# Altium PCB pcb.pcbdoc
Units mm, origin at the board's own origin, x right, y up, seen from the top; angles counter-clockwise.
Board outline 60 x 71 mm, 2 copper layers (Top Layer, Bottom Layer), stack 1.56 mm thick; 54 components, 49 nets, 248 pads, 127 vias.
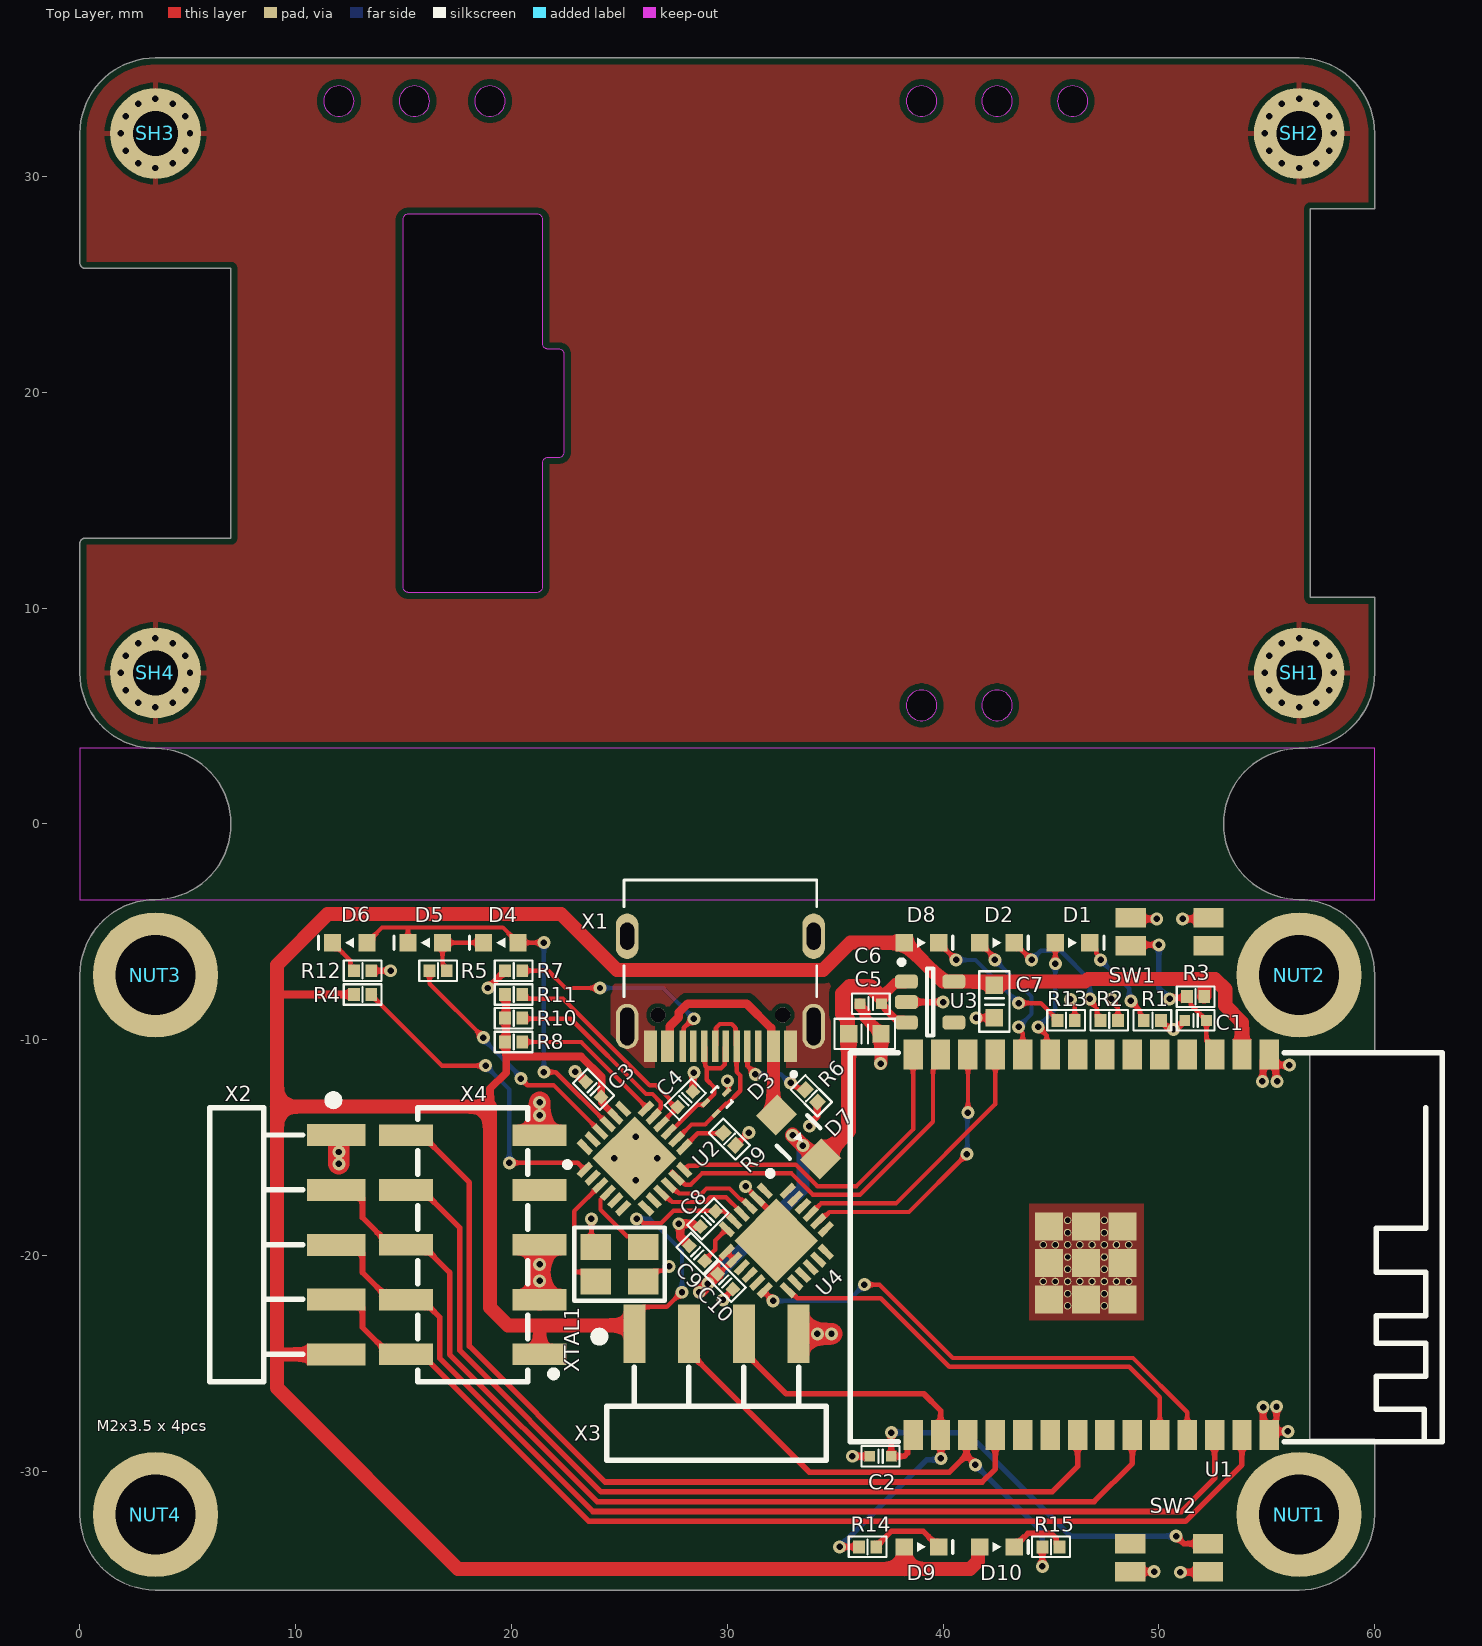
[diagram p0: Top Layer view]
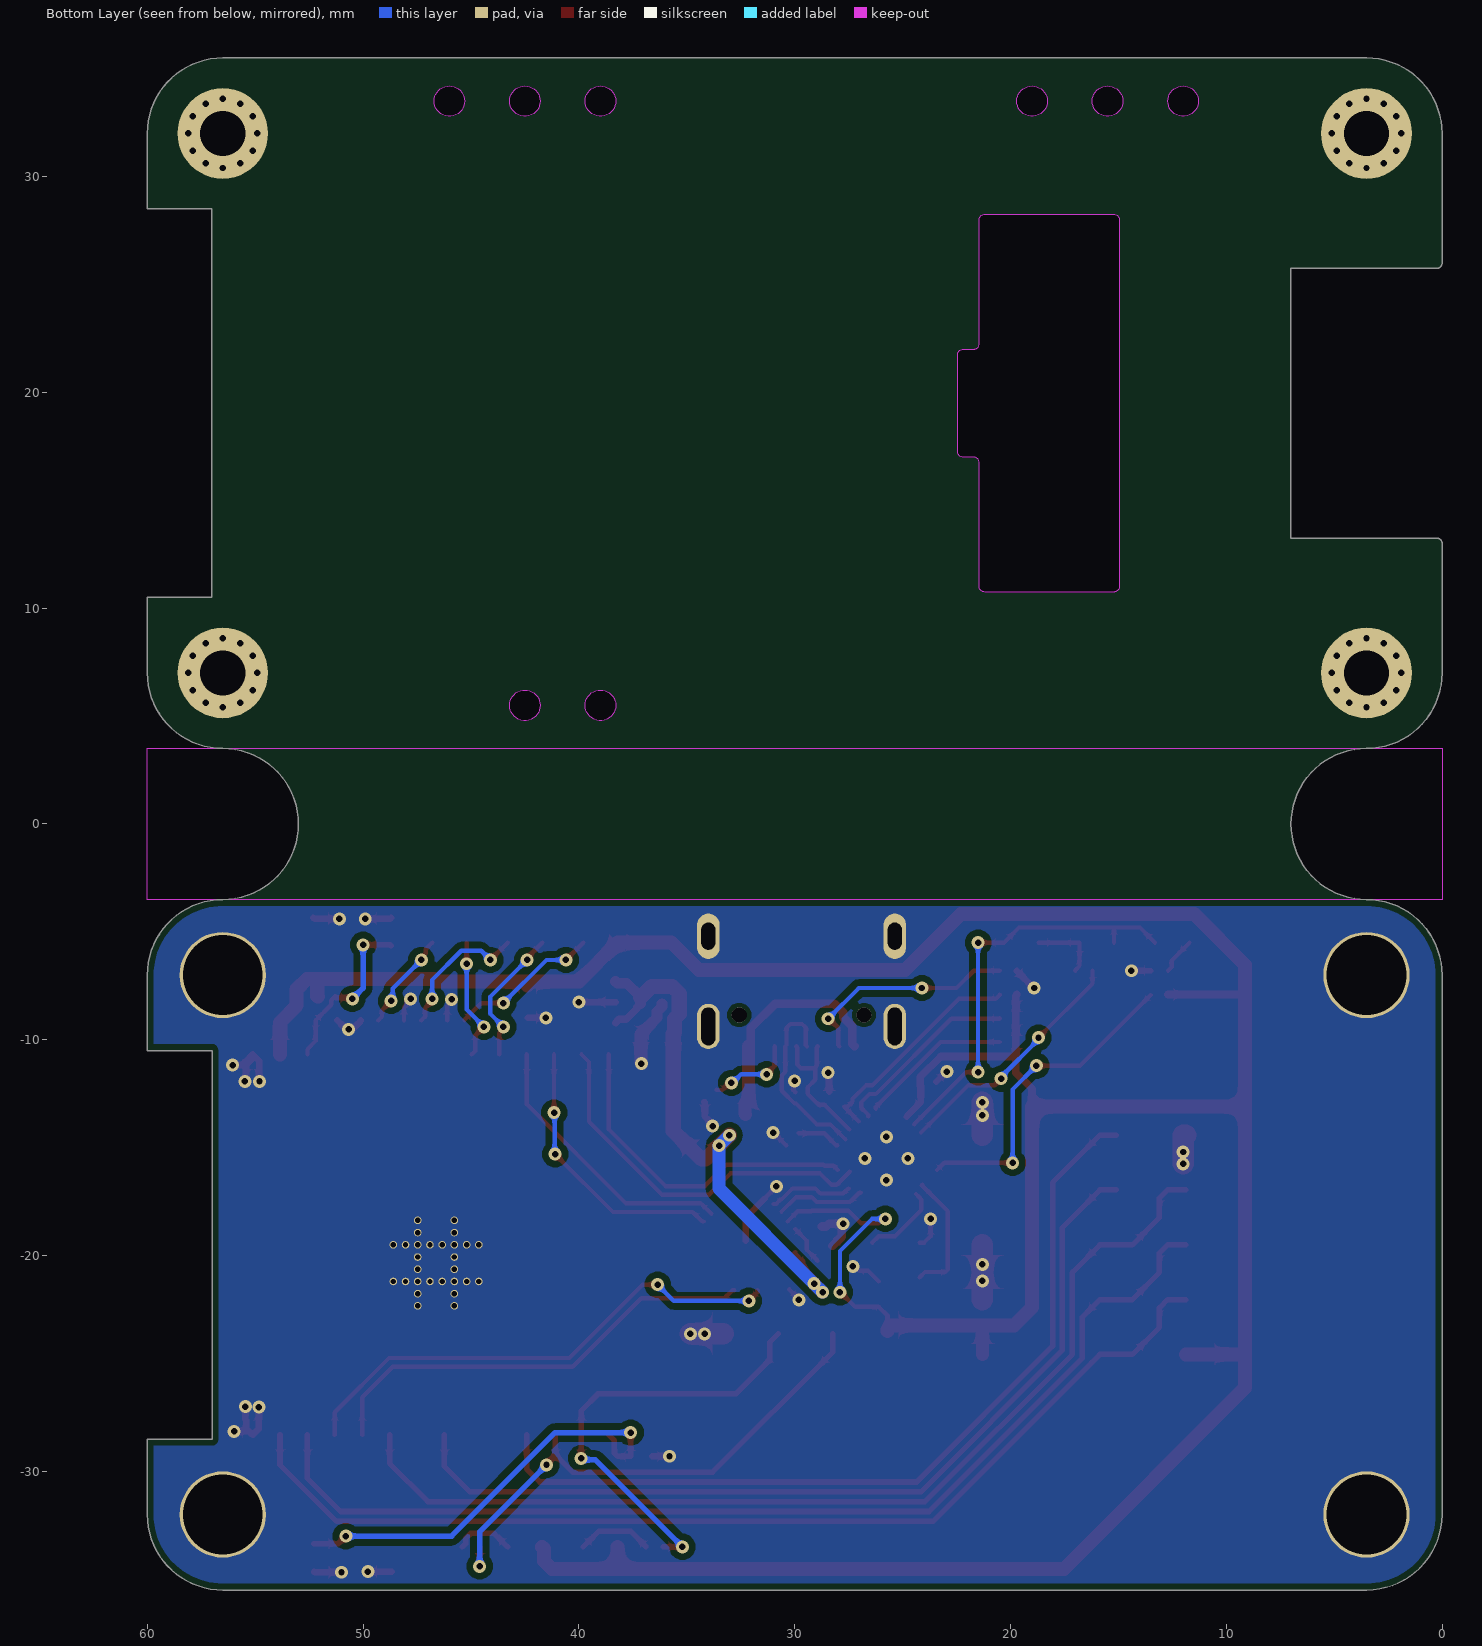
[diagram p1: Bottom Layer view, seen from below]
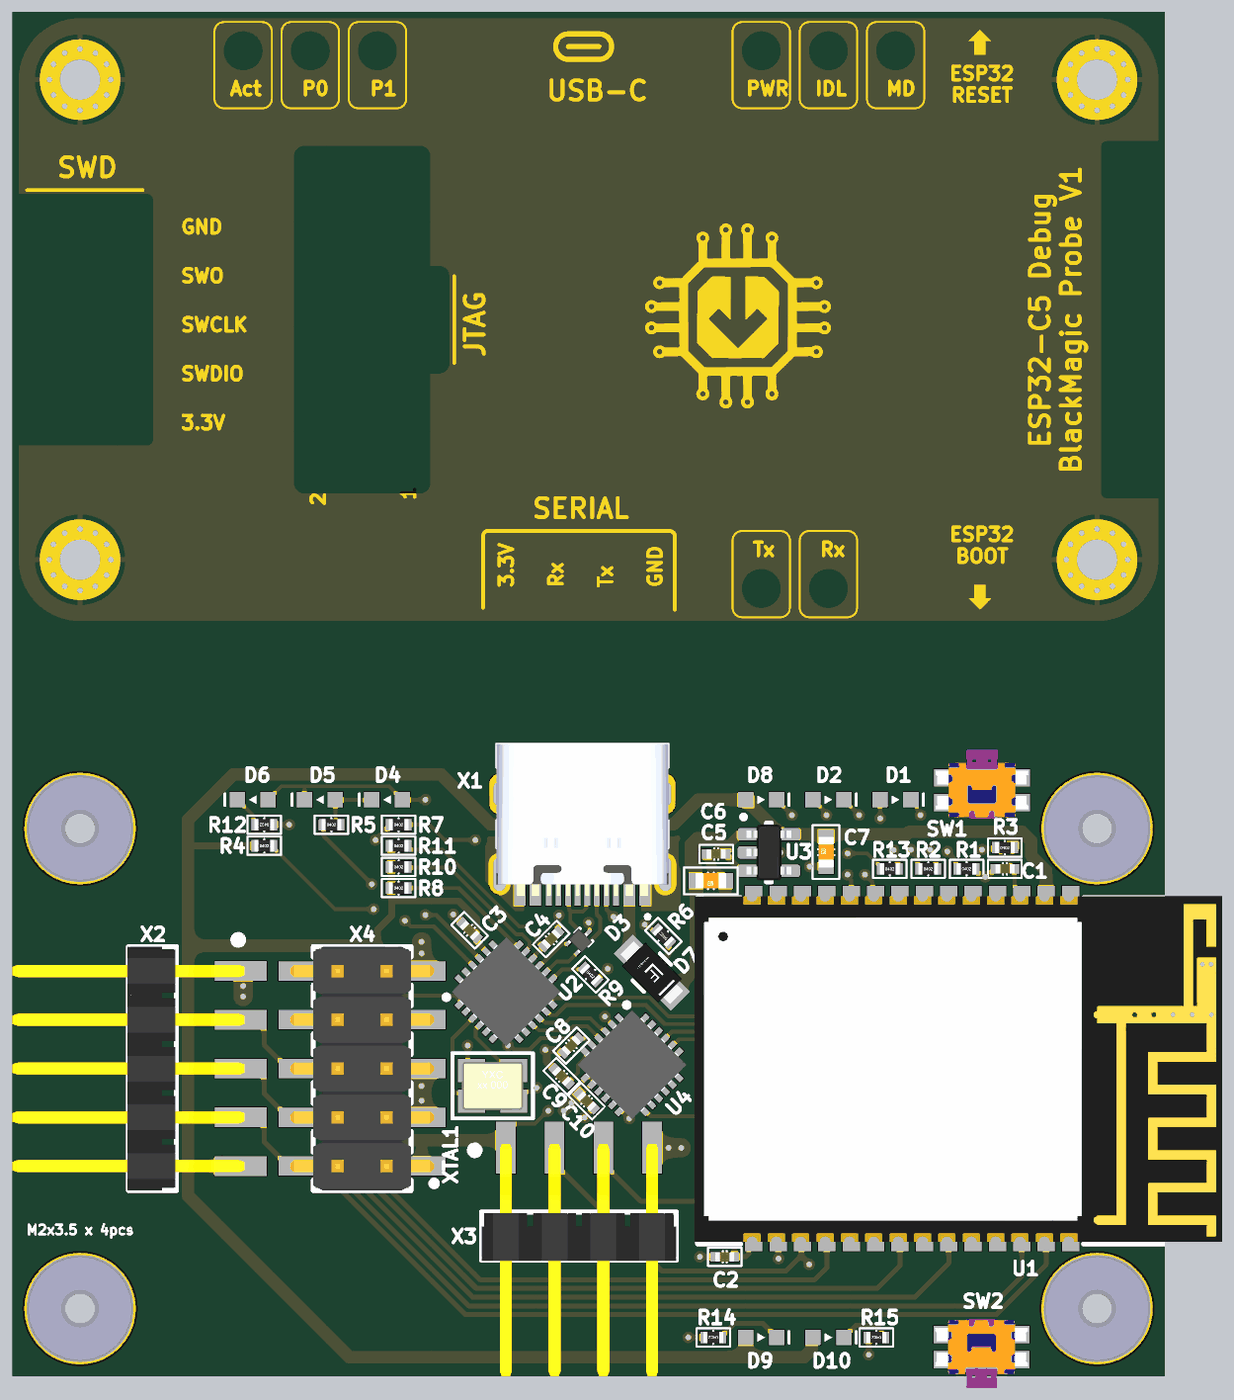
[diagram p2: 3D render of the assembled board from above, using the file's embedded part models]

## Layer stack, top to bottom
Top Solder: solder mask 0.02, Solder Resist, Dk 3.5
Top Layer: signal copper 0.035
Dielectric 1: prepreg 1.49, FR-4, Dk 4.6
Bottom Layer: signal copper 0.035
Bottom Solder: solder mask 0.02, Solder Resist, Dk 3.5

## Board outline
0,-32 0,-7 cw(c3.5,-7) 3.5,-3.5 ccw(c3.5,0) 7,0 ccw(c3.5,0) 3.5,3.5 cw(c3.5,7) 0,7 0,13.047 0,13.037 cw(c0.25,13) 0.213,13.25 0.203,13.25 7,13.25 7,25.75 0.213,25.75 cw(c0.25,26) 0,25.963 0,32 cw(c3.5,32) 3.5,35.5 56.5,35.5 cw(c56.5,32) 60,32 60,28.5 57.016,28.5 57.016,10.5 60,10.5 60,7 cw(c56.5,7) 56.5,3.5 ccw(c56.5,0) 53,0 ccw(c56.5,0) 56.5,-3.5 cw(c56.5,-7) 60,-7 60,-10.5 57,-10.5 57,-28.5 60,-28.5 60,-32 cw(c56.5,-32) 56.5,-35.5 3.5,-35.5 cw(c3.5,-32)
cut-out: 42,6 ccw(c42.5,5.5) 42,5 ccw(c42.5,5.5) 43,5 ccw(c42.5,5.5) 43,6 ccw(c42.5,5.5)
cut-out: 38.5,6 ccw(c39,5.5) 38.5,5 ccw(c39,5.5) 39.5,5 ccw(c39,5.5) 39.5,6 ccw(c39,5.5)
cut-out: 15.2,10.75 21.2,10.75 ccw(c21.2,11) 21.45,11 21.45,16.75 cw(c21.7,16.75) 21.7,17 22.2,17 ccw(c22.2,17.25) 22.45,17.25 22.45,21.75 ccw(c22.2,21.75) 22.2,22 21.7,22 cw(c21.7,22.25) 21.45,22.25 21.45,28 ccw(c21.2,28) 21.2,28.25 15.2,28.25 ccw(c15.2,28) 14.95,28 14.95,11 ccw(c15.2,11)
cut-out: 45.5,34 ccw(c46,33.5) 45.5,33 ccw(c46,33.5) 46.5,33 ccw(c46,33.5) 46.5,34 ccw(c46,33.5)
cut-out: 42,34 ccw(c42.5,33.5) 42,33 ccw(c42.5,33.5) 43,33 ccw(c42.5,33.5) 43,34 ccw(c42.5,33.5)
cut-out: 38.5,34 ccw(c39,33.5) 38.5,33 ccw(c39,33.5) 39.5,33 ccw(c39,33.5) 39.5,34 ccw(c39,33.5)
cut-out: 18.5,34 ccw(c19,33.5) 18.5,33 ccw(c19,33.5) 19.5,33 ccw(c19,33.5) 19.5,34 ccw(c19,33.5)
cut-out: 15,34 ccw(c15.5,33.5) 15,33 ccw(c15.5,33.5) 16,33 ccw(c15.5,33.5) 16,34 ccw(c15.5,33.5)
cut-out: 11.5,34 ccw(c12,33.5) 11.5,33 ccw(c12,33.5) 12.5,33 ccw(c12,33.5) 12.5,34 ccw(c12,33.5)

## Design rules (kind name [scope] priority, off if disabled: settings)
BoardOutlineClearance [All] p1: gap=0.3 ignorepadtopadclearanceinfootprint=FALSE
Clearance [All] p1: gap=0.2 ignorepadtopadclearanceinfootprint=FALSE except(0.3: Arc-Poly Track-Poly SMDPad-Poly THPad-Poly Via-Poly Fill-Poly Poly-Poly)
DiffPairsRouting [InDifferentialPair('USB')] p1: maxlimit=0.2 minlimit=0.2 mostfreqgap=0.2 toplayer_minwidth=0.279 toplayer_maxwidth=0.279 toplayer_prefwidth=0.279 bottomlayer_minwidth=0.279 bottomlayer_maxwidth=0.279 bottomlayer_prefwidth=0.279 maxuncoupledlength=12.7
HoleSize [All] p1: absolutevalues=TRUE maxlimit=4 minlimit=0.2 maxpercent=80.000 minpercent=20.000
MatchedLengths [InNetClass('Undefined')] p1: tolerance=0.5 checknetsindiffpair=FALSE checkdiffpairvsdiffpair=TRUE checkxsignals=TRUE checkothers=TRUE
MinimumSolderMaskSliver [All] p1: minsoldermaskwidth=0.02
PolygonConnect GNDPoligon [All vs InNet('GND')] p1: connectstyle=Direct reliefconductorwidth=0.254 reliefentries=4 polygonreliefangle="90 Angle" airgapwidth=0.254
PolygonConnect [All] p2: connectstyle=Relief reliefconductorwidth=0.254 reliefentries=4 polygonreliefangle="90 Angle" airgapwidth=0.254
RoutingVias [All] p1: holewidth=0.3 width=0.6 viastyle="Through Hole" minholewidth=0.3 minwidth=0.6 maxholewidth=0.3 maxwidth=0.6
SilkToSilkClearance [All] p1: silktosilkclearance=0
SilkToSolderMaskClearance [IsPad] p1: minsilkscreentomaskgap=0.01 clearancetoexposedcopper=TRUE
SolderMaskExpansion [All] p1: expansion=0.05 istentingtop=FALSE
Width [All] p1: maxlimit=25 minlimit=0.2 preferedwidth=1 minimp=50.000000 maximp=50.000000 favimp=50.000000
25 further rules are at their usual default settings.

## Classes and differential pairs
differential pair class USB: USB_1 USB_2 USB_3 USB_4
net class USB_RLINK: USB_1_N USB_1_P
net class USB_MCU: USB_2_N USB_2_P USB_3_N USB_3_P USB_4_N USB_4_P
component class USB: C3 C4 D3 D4 D5 D6 R4 R5 R6 R7 R8 R9 R10 R11 R12 U2 X1 XTAL1
component class sch: D9 D10 NUT1 NUT2 NUT3 NUT4 R14 R15 SH1 SH2 SH3 SH4 X2 X3 X4
component class POWER: C5 C6 C7 D7 D8 R13 U3
component class INTERFACE: C8 C9 C10 U4
component class ESP: C1 C2 D1 D2 R1 R2 R3 SW1 SW2 U1
differential pair USB_4: +USB_4_P -USB_4_N
differential pair USB_3: +USB_3_P -USB_3_N
differential pair USB_2: +USB_2_P -USB_2_N
differential pair USB_1: +USB_1_P -USB_1_N

## Components (designator, comment, footprint, x,y, rotation, side; value= is the part's Value field where it differs from the comment)
C1 "C0402" C_0402 51.7,-9.1 r0 top value=0.1uF
C2 "C0402" C_0402 37.1,-29.3 r180 top value=0.1uF
C3 "C0402" C_0402 23.8,-12.3 r315 top value=0.1uF
C4 "C0402" C_0402 28.054,-12.754 r225 top value=0.1uF
C5 "10uF 25V" C_0603 36.375,-9.725 r180 top
C6 "C0402" C_0402 36.65,-8.325 r0 top value=0.1uF
C7 "10uF 25V" C_0603 42.375,-8.225 r90 top
C8 "C0402" C_0402 29.1,-18.3 r45 top value=1uF
C9 "C0402" C_0402 28.6,-19.9 r315 top value=0.1uF
C10 "C0402" C_0402 29.9,-21.2 r135 top value=1uF
D1 "Emerald Green 515nm" "LED 0603 GREEN, 60°" 46,-5.5 r270 top locked
D2 "Emerald Green 515nm" "LED 0603 GREEN, 60°" 42.5,-5.5 r270 top locked
D3 "TPD2EUSB30DRTR" SOT-9X3-3 29.6,-12.8 r45 top
D4 "Yellow 590nm" "LED 0603 YELLOW, 60°" 19.5,-5.5 r90 top locked
D5 "Yellow 590nm" "LED 0603 YELLOW, 60°" 16,-5.5 r90 top locked
D6 "Yellow 590nm" "LED 0603 YELLOW, 60°" 12.5,-5.5 r90 top locked
D7 "SM5819PL-TP" SOD123FL 33.3,-14.5 r315 top
D8 "Red 645nm" "LED 0603 RED, 60°" 39,-5.5 r270 top locked
D9 "Red 645nm" "LED 0603 RED, 60°" 39,-33.5 r270 top locked
D10 "Emerald Green 515nm" "LED 0603 GREEN, 60°" 42.5,-33.5 r270 top locked
NUT1 "SMTSOM235BTR" SMTSOM235BTR 56.5,-32 r0 top locked
NUT2 "SMTSOM235BTR" SMTSOM235BTR 56.5,-7 r0 top locked
NUT3 "SMTSOM235BTR" SMTSOM235BTR 3.5,-7 r0 top locked
NUT4 "SMTSOM235BTR" SMTSOM235BTR 3.5,-32 r0 top locked
R1 "R0402" R_0402 49.7,-9.1 r180 top value=680
R2 "R0402" R_0402 47.7,-9.1 r180 top value=680
R3 "R0402" R_0402 51.7,-8 r180 top value=10k
R4 "R0402" R_0402 13.1,-7.9 r180 top value=10k
R5 "R0402" R_0402 16.6,-6.8 r180 top value=1.2k
R6 "R0402" R_0402 33.9,-12.6 r315 top value=5.1k
R7 "R0402" R_0402 20.1,-6.8 r180 top value=5.1k
R8 "R0402" R_0402 20.1,-10.1 r180 top value=10k
R9 "R0402" R_0402 30.1,-14.6 r135 top value=2.7k
R10 "R0402" R_0402 20.1,-9 r180 top value=10k
R11 "R0402" R_0402 20.1,-7.9 r180 top value=10k
R12 "R0402" R_0402 13.1,-6.8 r0 top value=1.2k
R13 "R0402" R_0402 45.7,-9.1 r180 top value=1.2k
R14 "R0402" R_0402 36.5,-33.5 r0 top value=1.2k
R15 "R0402" R_0402 45,-33.5 r0 top value=680
SH1 "Screw Hole" "Screw Hole 2.1mm/4.2mm" 56.5,7 r0 top locked
SH2 "Screw Hole" "Screw Hole 2.1mm/4.2mm" 56.5,32 r0 top locked
SH3 "Screw Hole" "Screw Hole 2.1mm/4.2mm" 3.5,32 r0 top locked
SH4 "Screw Hole" "Screw Hole 2.1mm/4.2mm" 3.5,7 r0 top locked
SW1 "SKSCLCE010" SKSCLCE010-Footprint-1 50.5,-5 r180 top locked
SW2 "SKSCLCE010" SKSCLCE010-Footprint-1 50.475,-34 r0 top locked
U1 "ESP32-C5-WROOM-1-N8R8" XCVR_ESP32-C5-WROOM-1-N8R8 46.218,-19.575 r270 top locked
U2 "FE1.1S-BQFN24B" QFN50P400X400X80-25N-D 25.7,-15.5 r45 top
U3 "TLV75733PDBVR" SOT23-5 38.3,-7.3 r0 top
U4 "CH342F" QFN50P400X400X80-25N-D 32.27,-19.302 r315 top
X1 "TYPE-C-31-M-12" HRO_TYPE-C-31-M-12 29.68,-5.2 r180 top locked
X2 "PLS2-5" PLS-5T 7.3,-19.5 r270 top locked
X3 "PLS2-4" PLS-4T 29.5,-28.2 r0 top locked
X4 "PLD-10" PLD-10T 18.2,-19.5 r90 top locked
XTAL1 "12MHz" NX3225GA 23.9,-19.6 r0 top

## Footprints (in the part's own frame and the unit in brackets; to place one, negate y for a bottom-side part, rotate by r counter-clockwise, add the part's x,y. Pads: shape width x height; smd on the part's side, far side on the other; paste and mask are expansions set on the pad)
C_0402 [mm]
  rect 0.5x0.5 smd: 1(-0.5,0) 2(0.5,0)
  silkscreen extent -0.87,-0.48 0.87,0.48, body extent -0.5,-0.25 0.5,0.25, height 0.5
C_0603 [mm] "Chip Capacitor; Body 1.6 x 0.8 mm (LxW typ)"
  rect 0.8x0.8 smd: 1(-0.75,0) 2(0.75,0)
  silkscreen extent -1.4,-0.7 1.4,0.7, body extent -0.8,-0.4 0.8,0.4, height 0.3
HRO_TYPE-C-31-M-12 [mm]
  rect 0.6x1.45 smd: A1B12(-3.25,5.095) A4B9(-2.45,5.095) B1A12(3.25,5.095) B4A9(2.45,5.095)
  rect 0.3x1.45 smd: A5(-1.25,5.095) A6(-0.25,5.095) A7(0.25,5.095) A8(1.25,5.095) B5(1.75,5.095) B6(0.75,5.095) B7(-0.75,5.095) B8(-1.75,5.095)
  oval 1.05x2.1 hole 0.65 slot 1.75 at 90 deg: S1(-4.32,4.18) S2(4.32,4.18)
  oval 1.05x2.1 hole 0.65 slot 1.25 at 90 deg: S3(-4.32,0) S4(4.32,0)
  round 0.7 hole 0.7 unplated: ""(-2.89,3.65) ""(2.89,3.65)
  silkscreen extent -4.47,-2.6 4.47,6.5, body extent -4.47,-2.6 4.47,5.31, height 3.31
"LED 0603 GREEN, 60°" [mm]
  rect 0.8x0.8 smd: 1(0,0.8) 2(0,-0.8)
  silkscreen extent -0.3,-0.2 0.3,1.45, body extent -0.4,-0.8 0.4,0.8, height 0.97
"LED 0603 RED, 60°" [mm]
  rect 0.8x0.8 smd: 1(0,0.8) 2(0,-0.8)
  silkscreen extent -0.3,-0.2 0.3,1.45, body extent -0.4,-0.8 0.4,0.8, height 0.97
"LED 0603 YELLOW, 60°" [mm]
  rect 0.8x0.8 smd: 1(0,0.8) 2(0,-0.8)
  silkscreen extent -0.3,-0.2 0.3,1.45, body extent -0.4,-0.8 0.4,0.8, height 0.97
NX3225GA [mm]
  rect 1.4x1.2 smd: 1(0,-1.6) 2(2.2,-1.6) 3(2.2,0) 4(0,0)
  silkscreen extent -1,-2.5 3.2,0.9, body extent -0.49,-2.05 2.69,0.45, height 0.69
PLD-10T [mm] "Connector; Header; 5x2 Position"
  rect 1x2.5 smd: 1(-5.08,-3.1) 2(-5.08,3.1) 3(-2.54,-3.1) 4(-2.54,3.1) 5(0,-3.1) 6(0,3.1) 7(2.54,-3.1) 8(2.54,3.1) 9(5.08,-3.1) 10(5.08,3.1)
  silkscreen extent -6.35,-3.9 6.35,2.55, body extent -6.35,-3.75 6.35,3.75, height 9.6
PLS-4T [mm] "Connector; Header; 4 Position"
  rect 1.02x2.7 smd paste+0 mask+0.05: 1(-3.81,4.572) 2(-1.27,4.572) 3(1.27,4.572) 4(3.81,4.572)
  silkscreen extent -5.84,-1.27 5.08,4.85, body extent -5.08,-7.32 5.08,4.78, height 2.54
PLS-5T [mm] "Connector; Header; 4 Position"
  rect 1.02x2.7 smd paste+0 mask+0.05: 1(-5.08,4.572) 2(-2.54,4.572) 3(0,4.572) 4(2.54,4.572) 5(5.08,4.572)
  silkscreen extent -7.11,-1.27 6.35,4.85, body extent -6.35,-7.32 6.35,4.78, height 2.54
QFN50P400X400X80-25N-D [mm]
  rect 0.8x0.3 smd: 1(-2,1.25) 2(-2,0.75) 3(-2,0.25) 4(-2,-0.25) 5(-2,-0.75) 6(-2,-1.25) 13(2,-1.25) 14(2,-0.75) 15(2,-0.25) 16(2,0.25) 17(2,0.75) 18(2,1.25)
  rect 0.3x0.8 smd: 7(-1.25,-2) 8(-0.75,-2) 9(-0.25,-2) 10(0.25,-2) 11(0.75,-2) 12(1.25,-2) 19(1.25,2) 20(0.75,2) 21(0.25,2) 22(-0.25,2) 23(-0.75,2) 24(-1.25,2)
  rect 2.75x2.75 smd: 25(0,0)
  silkscreen extent -2.52,1.88 -2.28,2.12, body extent -2.05,-2.05 2.05,2.05, height 0.8
R_0402 [mm]
  rect 0.55x0.6 smd: 1(-0.4,0) 2(0.4,0)
  silkscreen extent -0.87,-0.48 0.87,0.48, body extent -0.52,-0.3 0.52,0.3, height 0.34
"Screw Hole 2.1mm/4.2mm" [mm]
  round 4.2 hole 2.1 mask-2539.97: 1(0,0)
SKSCLCE010-Footprint-1 [mm]
  rect 1.4x0.9 smd mask+0.05: 1(-1.8,-0.65) 2(1.8,-0.65) 3(-1.8,0.65) 4(1.8,0.65)
  body extent -2.42,-2.1 2.42,1.46, height 1.27
SMTSOM235BTR [mm]
  round 5.8 / inner round 4 / far side round 4 hole 3.7 paste-2539.97 mask+0.102: 1(0,0)
  body extent -2.78,-2.77 2.78,2.77, height 3.66
SOD123FL [mm]
  rect 1.3x1.4 smd paste+0 mask+0: 1(-1.45,0) 2(1.45,0)
  silkscreen extent -0.43,-1 0.43,1, body extent -1.83,-0.88 1.82,0.87, height 1.1
SOT23-5 [mm]
  rrect50% 1.06x0.65 smd: 1(0,0) 2(0,-0.95) 3(0,-1.9) 4(2.2,-1.9) 5(2.2,0)
  silkscreen extent -0.32,-2.5 1.25,1, body extent -0.07,-2.41 2.27,0.51, height 1
SOT-9X3-3 [mm]
  rrect25% 0.46x0.2 smd: 1(-0.52,0.35) 2(-0.52,-0.35) 3(0.52,0)
  silkscreen extent 0.03,-0.5 0.4,0.5, body extent -0.55,-0.5 0.45,0.5, height 0.5
XCVR_ESP32-C5-WROOM-1-N8R8 [mm]
  rect 1.385x0.9 smd: 1(-8.899,8.902) 2(-8.899,7.632) 3(-8.899,6.362) 4(-8.899,5.092) 5(-8.899,3.822) 6(-8.899,2.552) 7(-8.899,1.282) 8(-8.899,0.012) 9(-8.899,-1.258) 10(-8.899,-2.528) 11(-8.899,-3.798) 12(-8.899,-5.068) 13(-8.899,-6.338) 14(-8.899,-7.608) 15(8.736,-7.608) 16(8.736,-6.338) 17(8.736,-5.068) 18(8.736,-3.798) 19(8.736,-2.528) 20(8.736,-1.258) 21(8.736,0.012) 22(8.736,1.282) 23(8.736,2.552) 24(8.736,3.822) 25(8.736,5.092) 26(8.736,6.362) 27(8.736,7.632) 28(8.736,8.902)
  rect 1.3x1.3 smd paste+0 mask+0.05: 29_1(-0.931,2.097) 29_2(0.769,2.097) 29_3(2.469,2.097) 29_4(-0.931,0.397) 29_5(0.769,0.397) 29_6(2.469,0.397) 29_7(-0.931,-1.303) 29_8(0.769,-1.303) 29_9(2.469,-1.303)
  round 0.35 hole 0.25 mask+0: 29_10(-0.075,2.382) 29_11(-0.075,1.816) 29_12(1.625,2.382) 29_13(1.625,1.816) 29_14(-1.207,1.25) 29_15(-0.641,1.25) 29_16(-0.075,1.25) 29_17(0.492,1.25) 29_18(1.058,1.25) 29_19(1.625,1.25) 29_20(2.191,1.25) 29_21(2.757,1.25) 29_22(-0.075,0.683) 29_23(-0.075,0.117) 29_24(1.625,0.683) 29_25(1.625,0.117) 29_26(-1.207,-0.45) 29_27(-0.641,-0.45) 29_28(-0.075,-0.45) 29_29(0.492,-0.45) 29_30(1.058,-0.45) 29_31(1.625,-0.45) 29_32(2.191,-0.45) 29_33(2.757,-0.45) 29_34(-0.075,-1.016) 29_35(-0.075,-1.582) 29_36(1.625,-1.016) 29_37(1.625,-1.582)
  silkscreen extent -8.97,-10.53 9.06,16.9, body extent -9.05,-10.7 8.95,16.8, height 3.33

## Part data
C1 C2 C3 C4 C6 C8 C9 C10: "Capacitor", Case/Package=0402, Tolerance="50V 10%"
  C1 C2 C3 C4 C6 C9: Part=CC0402KRX5R9BB104
  C8 C10: Part=CC0402KRX5R9BB105
C5 C7: library part C0603, "Capacitor", Part=CC0603MRX5R8BB106
D1 D2 D10: library part "GREEN LED 0603", "GREEN LED 0603, 60°", Color="Emerald Green 515nm", Part=APTD1608ZGC
D3: "2-channel ESD solution for SuperSpeed USB 3.0 interface 3-SOT-9X3 -40 to 85", Package="SOT-9X3-3 Texas Instruments", Availability=Warning, MF="Texas Instruments", MP=TPD2EUSB30DRTR, Part=TPD2EUSB30DRTR, Price=None, Purchase-URL=https://pricing.snapeda.com/search/part/TPD2EUSB30DRTR/?ref=eda, SnapEDA_Link=https://www.snapeda.com/parts/TPD2EUSB30DRTR/Texas%20Instruments/view-part/189118/?ref=snap
D4 D5 D6: library part YELLOW-LED-0603, "YELLOW LED 0603, 60°", Color="Yellow 590nm", Part=APTD1608SYCK
D7: library part D_SOD123, "Diode", Part=SM5819PL-TP
D8 D9: library part RED-LED-0603, "RED LED 0603, 60°", Color="Red 645nm", Part=APTD1608LSURCK
NUT1 NUT2 NUT3 NUT4: "NUT M2 H=3.5MM, Connector Standoff", Case/Package="NUT M2 H=3.5MM", Manufacturer=Sinhoo, Part=SMTSOM235BTR, Pins=1, Verified by ME=NO
R1 R2 R3 R4 R5 R6 R7 R8 R9 R10 R11 R12 R13 R14 R15: "Resistor", Case/Package=0402, Tolerance=1%
  R1 R2 R15: Part=RC0402FR-07680RL
  R3 R4 R8 R10 R11: Part=RC0402FR-0710KL
  R5 R12 R13 R14: Part=RC0402FR-071K2L
  R6 R7: Part=RC0402FR-075K1L
  R9: Part=RC0402FR-072K7L
SW1 SW2: "2.9mm 1.25mm Rectangle button 50mA Surface Mount 3.5mm SPST 12V SMD Tactile Switches ROHS", Current Rating=50mA, Manufacturer="Alps Alpine", Voltage Rating=12V, Case/Package=SKSCLCE010, Manufacturer_PN=SKSCLCE010, Part=SKSCLCE010, Pins=4, Verified by ME=YES
U1: "802.15.4, Bluetooth, WiFi 802.11b/g/n/ac/ax, Bluetooth v5.0, Thread, ZigbeeÂ® Transceiver Module 2.412GHz ~ 2.484GHz, 5.18GHz ~ 5.885GHz Antenna Not Included Surface Mount", Package=None, Check_prices=https://www.snapeda.com/parts/ESP32-C5-WROOM-1U-N8R8/Espressif+Systems/view-part/?ref=eda, MF="Espressif Systems", MP=ESP32-C5-WROOM-1U-N8R8, Part=ESP32-C5-WROOM-1-N8R8, SnapEDA_Link=https://www.snapeda.com/parts/ESP32-C5-WROOM-1U-N8R8/Espressif+Systems/view-part/?ref=snap
U2: "USB 2.0 HIGH SPEED 4-PORT HUB CONTROLLER", Manufacturer_Name="Terminus Technology", Datasheet Link=https://datasheet.lcsc.com/lcsc/2306141021_Terminus-Tech-FE1-1S-BQFN24B_C6776948.pdf, Height=0.8mm, Part=FE1.1S-BQFN24B
U3: library part TPL720F33-5TR, "Ultra-Low Quiescent Current LDO", Part=TLV75733PDBVR
X1: "USB Connectors 24 Receptacle 1 8.94*7.3mm RoHS", Package=None, Availability=Unavailable, MP=TYPE-C-31-M-12, Part=TYPE-C-31-M-12, Price=None
X2: "Header, 5-Pin", LatestRevisionDate=17-Jul-2002, LatestRevisionNote="Re-released for DXP Platform.", Part=X6511WRS-05H-C60D48, Publisher="Altium Limited"
X3: "Header, 4-Pin", LatestRevisionDate=17-Jul-2002, LatestRevisionNote="Re-released for DXP Platform.", Part=X6511WRS-04H-C60D48, Publisher="Altium Limited"
X4: "male; PIN: 10; 2.54mm"
XTAL1: library part SMD3225-4P, "Crystal Oscillator", Part=X322512MSB4SI
SH1 SH2 SH3 SH4: Internal_PN=-, Pin Count=1
U4: Part=CH342F

## Via types
v1: diameter 0.6, hole 0.3, Top Layer to Bottom Layer, tented both sides, 127 vias

## Nets (pads, with @x,y where several pads share a name; then routed paths per layer and width w, separated by ;. In a path a pad name is that pad's centre, name@x,y a point inside that pad or via, vN(x,y) a via of type N, cw(c..) or ccw(c..) an arc to the next point about the centre after c; other vN are vias at no path point)
\RST: U1.18 X4.10 | length 40.2
  Top Layer w0.256: X4.10 15.85,-14.42 18.046,-16.616 18.046,-24.196 24.342,-30.492 41.808,-30.492 42.42,-29.88 U1.18
BOOT: C2.1 SW2.4 U1.15 | length 19.7
  Top Layer w0.256: v1(37.6,-28.2) C2.1 38.2,-29.3 38.35,-29.15 38.35,-28.571 U1.15 ; v1(50.8,-33) 51.15,-33.35 SW2.4
  Bottom Layer w0.256: v1(37.6,-28.2) 41.1,-28.2 45.9,-33 v1(50.8,-33)
CHIP_EN: C1.2 R3.2 SW1.4 U1.3 | length 8.1
  Top Layer w0.2: R3.2 51.475,-8.175 51.475,-8.375 C1.2 52.2,-10.054 52.58,-10.434 U1.3
  Top Layer w0.256: SW1.4 48.75,-5.6 v1(50,-5.6) ; v1(50.5,-8.1) 50.55,-8.05 51.25,-8.05 R3.2
  Bottom Layer w0.256: v1(50,-5.6) 50,-7.6 v1(50.5,-8.1)
DRV: D4.2 D5.1 D6.2 U2.21 | length 19.4
  Top Layer w0.2: D6.2 14,-4.8 15.201,-4.8 ; D5.1 15.2,-4.801 ; v1(21.5,-11.5) 22.054,-11.5 U2.21 ; v1(21.5,-5.5) D4.2 19.6,-4.8 15.201,-4.8 ; 15.2,-4.801 15.201,-4.8
  Bottom Layer w0.2: v1(21.5,-11.5) v1(21.5,-5.5)
GND: C1.1 C2.2 C3.1 C4.1 C5.1 C6.1 C7.1 C8.1 C9.1 C10.1 D3.3 NUT1.1 NUT2.1 NUT3.1 NUT4.1 R1.1 R2.1 R6.2 R7.2 R9.1 R12.2 R13.1 SW1.1 SW1.2 SW2.1 SW2.2 U1.1 U1.28 U1.29_1 U1.29_2 U1.29_3 U1.29_4 U1.29_5 U1.29_6 U1.29_7 U1.29_8 U1.29_9 U1.29_10 U1.29_11 U1.29_12 U1.29_13 U1.29_14 U1.29_15 U1.29_16 U1.29_17 U1.29_18 U1.29_19 U1.29_20 U1.29_21 U1.29_22 U1.29_23 U1.29_24 U1.29_25 U1.29_26 U1.29_27 U1.29_28 U1.29_29 U1.29_30 U1.29_31 U1.29_32 U1.29_33 U1.29_34 U1.29_35 U1.29_36 U1.29_37 U2.25 U3.2 U4.2 U4.25 X1.A1B12 X1.B1A12 X1.S1 X1.S2 X1.S3 X1.S4 X2.1 X3.4 X4.3 X4.5 X4.9 XTAL1.2 XTAL1.4 | length 45
  Top Layer w0.2: v1(23.7,-18.3) 23.7,-19.1 24,-19.4 XTAL1.4@24.2,-19.4 ; XTAL1.2 26.6,-20.7 26.992,-20.7 27.192,-20.5 v1(27.3,-20.5) ; v1(29.8,-22.05) 29.8,-22.029 30.254,-21.575 C10.1 ; D3.3 30.06,-12.34 30.06,-11.96 v1(30,-11.9) ; R9.1 30.4,-14.883 30.983,-14.3 v1(31,-14.3) ; v1(30.852,-16.791) 30.852,-16.807 31.386,-17.341 U4.2 ; v1(45.9,-8.125) 45.9,-8.233 46.1,-8.433 R13.1 ; v1(47.8,-8.1) 47.8,-8.2 48.1,-8.5 R2.1
  Top Layer w0.254: R12.2 v1(14.4,-6.8)
  Top Layer w0.3: v1(18.9,-7.6) 18.925,-7.6 19.7,-6.825 R7.2 ; v1(22.95,-11.475) 22.963,-11.475 23.434,-11.946 C3.1 ; C4.1 28.407,-11.568 v1(28.45,-11.525) ; U4.2 32.27,-18.241 U4.25 ; v1(33.8,-14) 33.8,-13.919 34.165,-13.554 34.165,-12.901 R6.2 ; v1(35.8,-29.3) C2.2 ; U3.2 v1(40,-8.25) ; v1(41.528,-8.98) 41.53,-8.978 42.372,-8.978 C7.1 ; SW2.1 v1(49.775,-34.65) ; SW1.2 48.75,-4.4 v1(49.9,-4.4) ; R1.1 50.1,-9.125 50.437,-9.462 50.618,-9.462 v1(50.675,-9.519) 50.732,-9.462 50.838,-9.462 C1.1 ; v1(51,-34.675) 52.25,-34.675 SW2.2 ; v1(51.1,-4.4) 52.25,-4.4 SW1.1 ; v1(54.8,-11.925) 54.82,-11.905 54.82,-10.976 U1.1 ; v1(54.825,-27.025) 54.825,-28.016 U1.28 U1.28@55.281,-28.15 ; v1(55.45,-27) 55.45,-27.593 55.42,-27.623 55.42,-28.011 U1.28@55.281,-28.15 ; v1@55.5,-12 55.5,-11.95 v1(55.475,-11.925) 55.42,-11.87 U1.1@55.42,-11.175 ; v1(55.975,-28.15) U1.28@55.281,-28.15 ; v1(56.05,-11.175) U1.1@55.42,-11.175 ; U1.1 55.12,-10.875 U1.1@55.42,-11.175 ; U1.1 55.42,-10.976 U1.1@55.42,-11.175
  Top Layer w0.4: C9.1 27.825,-19.125 27.825,-18.6 v1(27.75,-18.525) 28.406,-18.525 28.534,-18.654 C8.1
  Top Layer w0.5: C6.1 36.15,-8.471 36.375,-8.696 36.375,-8.975 C5.1
  Top Layer w0.6: v1(37.1,-11.1) 37.125,-11.075 C5.1
  Top Layer w1: X2.1 11.99,-14.42 12,-14.43 v1(12,-15.2) v1(12,-15.75) ; X4.3 X4.5 ; X4.9 v1(21.3,-12.9) ; X3.4 v1(34.828,-23.628)
  other v1: 34.169,-23.628 21.3,-21.173 21.3,-20.407 25.75,-16.5 24.75,-15.5 26.75,-15.5 25.75,-14.5 21.3,-13.5
GND_COVER: SH1.1 SH2.1 SH3.1 SH4.1
  other v1: 3.5,5.4 56.5,5.4 2.7,5.614 4.3,5.614 55.7,5.614 57.3,5.614 2.114,6.2 4.886,6.2 55.114,6.2 57.886,6.2 1.9,7 5.1,7 54.9,7 58.1,7 2.114,7.8 4.886,7.8 55.114,7.8 57.886,7.8 2.7,8.386 4.3,8.386 55.7,8.386 57.3,8.386 3.5,8.6 56.5,8.6 3.5,30.4 56.5,30.4 2.7,30.614 4.3,30.614 55.7,30.614 57.3,30.614 2.114,31.2 4.886,31.2 55.114,31.2 57.886,31.2 1.9,32 5.1,32 54.9,32 58.1,32 2.114,32.8 4.886,32.8 55.114,32.8 57.886,32.8 2.7,33.386 4.3,33.386 55.7,33.386 57.3,33.386 3.5,33.6 56.5,33.6
LED_1: R5.2 U2.22 | length 11.5
  Top Layer w0.2: R5.2 16.2,-7.4 v1(18.7,-9.9) ; v1(20.429,-11.8) 20.431,-11.8 20.731,-12.1 21.946,-12.1 U2.22@24.147,-14.3
  Bottom Layer w0.2: v1(18.7,-9.9) 18.7,-9.985 20.429,-11.715 v1(20.429,-11.8)
NetC4_2: C4.2 R11.1 U2.16 | length 10.4
  Top Layer w0.2: R11.1 20.5,-7.925 20.675,-8.1 22.388,-8.1 26.401,-12.113 26.697,-12.113 27.319,-12.735 27.319,-12.876 27.551,-13.107 C4.2 U2.16@27.026,-13.781
NetC9_2: C9.2 U4.6 | length 1.9
  Top Layer w0.2: C9.2 28.954,-20.214 29.445,-19.723 29.445,-19.298 U4.6
NetD1_1: D1.1 R1.2 | length 4.6
  Top Layer w0.2: D1.1 47.1,-5.8 47.1,-5.992 47.3,-6.192 v1(47.3,-6.3) ; v1(48.7,-8.2) 49.125,-8.625 49.125,-8.925 R1.2
  Bottom Layer w0.2: v1(47.3,-6.3) 48.623,-7.623 48.623,-8.123 v1(48.7,-8.2)
NetD1_2: D1.2 U1.9 | length 5.7
  Top Layer w0.2: v1(44.4,-9.4) 44.801,-9.801 44.801,-10.518 U1.9 ; v1(45.2,-6.475) D1.2
  Bottom Layer w0.2: v1(44.4,-9.4) 45.2,-8.6 v1(45.2,-6.475)
NetD2_1: D2.1 R2.2 | length 6.6
  Top Layer w0.2: D2.1 v1(44.1,-6.3) ; v1(46.8,-8.1) 46.8,-8.208 47.125,-8.533 47.125,-8.925 R2.2
  Bottom Layer w0.2: v1(44.1,-6.3) 44.525,-5.875 45.449,-5.875 46.8,-7.226 v1(46.8,-8.1)
NetD2_2: D2.2 U1.10 | length 6.5
  Top Layer w0.2: D2.2 42.4,-6.2 v1(42.4,-6.3) ; v1(43.5,-9.4) 43.5,-9.508 43.69,-9.698 U1.10
  Bottom Layer w0.2: v1(42.4,-6.3) 44.1,-8 44.1,-8.8 v1(43.5,-9.4)
NetD4_1: D4.1 D5.2 R5.1 | length 3.3
  Top Layer w0.2: R5.1 17,-6.775 16.8,-6.575 D5.2 D4.1
NetD6_1: D6.1 R12.1 | length 1.7
  Top Layer w0.2: D6.1 12.525,-6.325 12.525,-6.625 R12.1
NetD8_1: D8.1 R13.2 | length 7
  Top Layer w0.2: D8.1 v1(40.6,-6.3) ; v1(43.5,-8.3) 44.525,-8.3 45.3,-9.075 R13.2
  Bottom Layer w0.2: v1(40.6,-6.3) 41.5,-6.3 v1(43.5,-8.3)
NetD9_1: D9.1 R14.2 | length 3.5
  Top Layer w0.256: R14.2 36.9,-33.475 37.603,-32.772 39.072,-32.772 D9.1
NetD10_1: D10.1 R15.2 | length 2.8
  Top Layer w0.256: D10.1 43.928,-32.872 45.011,-32.872 45.253,-33.114 45.253,-33.353 R15.2
NetR4_1: R4.1 U2.1 | length 15.2
  Top Layer w0.2: R4.1@13.503,-7.928 16.775,-11.2 v1(18.8,-11.2) ; v1(19.9,-15.7) 23.072,-15.7 U2.1
  Bottom Layer w0.2: v1(18.8,-11.2) 19.9,-12.3 v1(19.9,-15.7)
NetR6_1: R6.1 X1.A5 | length 4.1
  Top Layer w0.2: X1.A5 30.93,-11.211 31.3,-11.581 v1(31.3,-11.6) ; v1(32.93,-12) 33.038,-12 33.363,-12.324 33.61,-12.324 R6.1
  Bottom Layer w0.2: v1(31.3,-11.6) 32.481,-11.6 32.881,-12 v1(32.93,-12)
NetR7_1: R7.1 X1.B5 | length 10.4
  Top Layer w0.2: R7.1 21.701,-6.8 22.501,-7.6 v1(24.1,-7.6) ; X1.B5 27.98,-10.245 27.98,-9.446 28.401,-9.025 v1(28.45,-9.025)
  Bottom Layer w0.2: v1(24.1,-7.6) 27.025,-7.6 v1(28.45,-9.025)
NetR8_1: R8.1 U2.18 | length 7.1
  Top Layer w0.2: R8.1 23.226,-10.1 26.244,-13.118 26.244,-13.188 U2.18
NetR9_2: R9.2 U2.13 | length 2
  Top Layer w0.2: U2.13@28.012,-14.885 28.083,-14.885 28.633,-14.335 29.799,-14.335 R9.2
NetR10_1: R10.1 U2.17 | length 8.8
  Top Layer w0.2: R10.1 20.525,-9.025 22.748,-9.025 26.236,-12.513 26.531,-12.513 26.919,-12.901 26.919,-13.149 26.584,-13.485 U2.17
NetU1_11: U1.11 U4.21 | length 13
  Top Layer w0.2: U4.21 34.345,-17.58 37.82,-17.58 42.42,-12.98 U1.11
NetU1_12: U1.12 U4.20 | length 12.8
  Top Layer w0.2: U4.20 34.285,-18.418 34.723,-17.98 38.42,-17.98 v1(41.1,-15.3) ; v1(41.15,-13.375) U1.12
  Bottom Layer w0.2: v1(41.1,-15.3) 41.125,-15.275 41.125,-13.4 v1(41.15,-13.375)
NetU1_24: U1.24 U4.13 | length 21
  Top Layer w0.2: U4.13 32.871,-21.6 33.249,-21.978 37.112,-21.978 40.284,-25.15 48.625,-25.15 50.04,-26.565 U1.24
NetU1_25: U1.25 U4.12 | length 23.7
  Top Layer w0.2: U4.12 31.718,-21.622 31.718,-21.693 v1(32.125,-22.1) ; v1(36.35,-21.35) 37.05,-21.35 40.45,-24.75 48.8,-24.75 51.31,-27.26 U1.25
  Bottom Layer w0.2: v1(32.125,-22.1) 35.6,-22.1 v1(36.35,-21.35)
NetU2_3: U2.3 XTAL1.1 | length 5.9
  Top Layer w0.2: U2.3 22.9,-17.946 22.9,-20.641 23.017,-20.759 23.959,-20.759 XTAL1.1@24.2,-21
NetU2_4: U2.4 XTAL1.3 | length 3.7
  Top Layer w0.2: U2.4@24.377,-17.147 24.203,-17.321 24.127,-17.397 24.127,-17.879 25.349,-19.1 26.1,-19.1 XTAL1.3@26.4,-19.4
SERIAL_RX: R15.1 U1.17 X3.2 | length 24.8
  Top Layer w0.256: X3.2 28.23,-24.468 33.798,-30.036 40.289,-30.036 41.087,-29.238 ; U1.17 41.087,-28.374 41.087,-29.238 ; v1(41.5,-29.7) 41.5,-29.651 41.087,-29.238 ; v1(44.6,-34.4) R15.1
  Bottom Layer w0.256: v1(41.5,-29.7) 44.6,-32.8 v1(44.6,-34.4)
SERIAL_TX: R14.1 U1.16 X3.3 | length 20.6
  Top Layer w0.256: X3.3 31.152,-24.01 31.152,-24.85 31.175,-24.85 32.728,-26.403 39.103,-26.403 39.88,-27.18 U1.16 39.9,-28.331 v1(39.9,-29.4) ; v1(35.2,-33.5) R14.1
  Bottom Layer w0.256: v1(35.2,-33.5) 39.234,-29.466 39.834,-29.466 v1(39.9,-29.4)
TCK_SWCLK: U1.26 X2.3 X4.4 | length 50.1
  Top Layer w0.256: X2.3 12.712,-19.5 13.094,-19.882 13.094,-20.784 14.35,-22.04 X4.4 15.85,-22.04 16.678,-22.868 16.678,-24.763 23.775,-31.86 51.04,-31.86 52.58,-30.32 U1.26
TDI: U1.21 X4.8 | length 42.2
  Top Layer w0.256: X4.8 15.85,-16.96 16.222,-17.332 17.59,-18.7 17.59,-24.385 24.153,-30.948 45.052,-30.948 46.23,-29.77 U1.21
TDO_SWO: U1.23 X2.2 X4.6 | length 47.7
  Top Layer w0.256: X2.2 12.712,-16.96 13.094,-17.342 13.094,-18.244 14.35,-19.5 X4.6 15.85,-19.5 16.222,-19.872 17.134,-20.784 17.134,-24.574 23.964,-31.404 46.996,-31.404 48.77,-29.63 U1.23
TMS_SWDIO: U1.27 X2.4 X4.2 | length 49.2
  Top Layer w0.256: X2.4 12.712,-22.04 13.094,-22.422 13.094,-23.324 14.35,-24.58 X4.2 15.85,-24.58 16.222,-24.952 23.586,-32.316 51.229,-32.316 53.85,-29.695 U1.27
USB_1_N: U1.13 U2.11 | length 17.6
  Top Layer w0.2: U2.11@27.45,-16.119 28.051,-16.719 28.299,-16.719 28.827,-16.191 32.977,-16.191 33.966,-17.18 36.149,-17.18 39.53,-13.798 39.53,-11.026 U1.13
USB_1_P: U1.14 U2.12 | length 15.7
  Top Layer w0.2: U2.12 28.193,-15.835 28.618,-15.835 28.662,-15.791 33.177,-15.791 34.166,-16.78 35.983,-16.78 38.61,-14.153 U1.14
USB_2_N: U2.9 U4.4 | length 4.2
  Top Layer w0.2: U2.9 27.008,-17.091 27.436,-17.519 28.977,-17.519 29.203,-17.293 29.939,-17.293 U4.4@30.609,-17.963
USB_2_P: U2.10 U4.3 | length 3.9
  Top Layer w0.2: U2.10@27.497,-16.897 27.521,-16.897 27.744,-17.119 28.811,-17.119 29.037,-16.893 30.105,-16.893 30.588,-17.376 30.626,-17.376 30.86,-17.609 U4.3@30.963,-17.609
USB_3_N: U2.7
USB_3_P: U2.8
USB_4_N: U2.5
USB_4_P: U2.6
USB_N: D3.2 U2.14 X1.A7 X1.B7 | length 8.8
  Top Layer w0.2: U2.14 28.337,-13.923 28.972,-13.923 D3.2 29.94,-12.955 30.01,-12.955 30.6,-12.366 30.6,-11.651 30.43,-11.481 X1.B7 30.38,-10.245 30.38,-9.446 30.204,-9.27 29.656,-9.27 29.48,-9.446 29.48,-10.245 X1.A7
USB_P: D3.1 U2.15 X1.A6 X1.B6 | length 6.8
  Top Layer w0.2: U2.15@27.467,-14.157 27.621,-14.003 28.612,-13.012 28.893,-13.012 29.4,-12.505 29.4,-12.206 29.05,-11.856 29.05,-11.276 28.98,-11.206 28.98,-10.345 X1.B6 ; 29.05,-11.32 29.704,-11.32 29.88,-11.144 29.88,-10.345 X1.A6
VCC3.3V: C3.2 C7.2 C8.2 D8.2 D9.2 D10.2 R3.1 R4.2 R8.2 R10.2 R11.2 U1.2 U2.20 U3.5 U4.5 X2.5 X3.1 X4.1 | length 169.1
  Top Layer w0.2: X3.1 25.69,-23.485 25.69,-22.788 26.1,-22.378 27.196,-22.378 27.874,-21.7 v1(27.9,-21.7) ; v1(25.8,-18.3) 25.908,-18.3 26.108,-18.5 26.926,-18.5 27.507,-17.919 29.214,-17.919 29.241,-17.946 C8.2 ; C8.2@29.432,-17.946 29.854,-17.946 U4.5
  Top Layer w0.3: C3.2@24.146,-12.654 24.146,-12.886 U2.20
  Top Layer w0.35: 9.125,-7.957 9.182,-7.9 R4.2 ; 19,-13.1 19,-12.275 19.75,-11.525 19.75,-10.775 ; R11.2 19.75,-7.95 19.75,-9 19.75,-10.1 19.75,-10.775 ; C3.2@24.154,-12.646 24.154,-12.163 24.175,-12.141 24.175,-11.72 23.23,-10.775 19.75,-10.775
  Top Layer w0.6: X4.1 21.3,-23.277 21.342,-23.235
  Top Layer w0.65: X2.5 9.134,-24.58 9.125,-24.571 ; X3.1@25.69,-23.485 25.69,-23.42 25.505,-23.235 21.342,-23.235 19.835,-23.235 19,-22.4 19,-13.1 9.125,-13.1 ; D9.2 38.2,-34.525 ; D10.2 41.625,-33.575 41.625,-34.144 41.244,-34.525 38.2,-34.525 ; C7.2 42.315,-7.415 C7.2@42.315,-7.3 ; R3.1 52.124,-7.976 52.124,-7.175 ; U1.2 53.85,-9.194 53.075,-8.419 53.075,-7.658 52.592,-7.175 52.124,-7.175 ; 9.125,-24.571 9.125,-13.1 ; 9.125,-24.571 9.125,-26.125 17.525,-34.525 38.2,-34.525 ; 9.125,-13.1 9.125,-7.957 9.125,-6.533 11.483,-4.175 22.292,-4.175 24.892,-6.775 34.435,-6.775 35.71,-5.5 D8.2 40,-7.3 U3.5 C7.2@42.315,-7.3 ; C7.2@42.315,-7.3 46.586,-7.3 46.711,-7.175 52.124,-7.175
  Bottom Layer w0.2: v1(25.8,-18.3) 26.413,-18.3 27.9,-19.787 v1(27.9,-21.7)
VCC5V: C5.2 C6.2 C10.2 D7.2 U3.1 U3.3 U4.7 U4.8 | length 29.6
  Top Layer w0.2: U4.8 U4.8@30.266,-20.186 ; U4.8@30.266,-20.186 30.29,-20.162 30.29,-20.15 U4.7 29.972,-19.903 29.607,-20.267 29.607,-20.378 29.546,-20.438 C10.2 29.605,-20.846 U4.8@30.266,-20.186
  Top Layer w0.35: C6.2 37.32,-8.495 37.32,-8.56 37.81,-9.05 38.15,-9.05 U3.3
  Top Layer w0.5: C6.2 37.15,-8.047 37.15,-8.004 37.779,-7.375 38.225,-7.375 U3.1
  Top Layer w0.6: v1(29.1,-21.3) v1(28.7,-21.7) 28.7,-21.693 C10.2
  Top Layer w0.7: v1(33.023,-14.423) 33.023,-14.425 v1@33.448,-14.85 ; v1(33.5,-14.9) 33.45,-14.85 v1@33.448,-14.85 ; 37.15,-8.047 36.628,-7.525 35.672,-7.525 35.35,-7.847 35.35,-8.803 35.575,-9.028 35.575,-9.675 C5.2 35.625,-14.226 D7.2 34.123,-15.525 v1@33.448,-14.85
  Bottom Layer w0.6: v1(28.7,-21.7) v1(29.1,-21.3) 33.5,-16.9 v1(33.5,-14.9) 33.45,-14.85 33.448,-14.85 33.023,-14.425 v1(33.023,-14.423)
VCC5VUSB: D7.1 X1.A4B9 X1.B4A9 | length 10.8
  Top Layer w0.4: X1.B4A9 27.33,-10.195 27.33,-9.371 27.75,-8.951 27.75,-8.735 28.16,-8.325 30.901,-8.325 32.03,-9.454 32.03,-10.195 X1.A4B9
  Top Layer w0.6: X1.A4B9 32.13,-12.764 32.31,-12.944 32.31,-13.439 D7.1
pads on no net: SW1.3 SW2.3 U1.4 U1.5 U1.6 U1.7 U1.8 U1.19 U1.20 U1.22 U2.2 U2.19 U2.23 U2.24 U3.4 U4.1 U4.9 U4.10 U4.11 U4.14 U4.15 U4.16 U4.17 U4.18 U4.19 U4.22 U4.23 U4.24 X1. X1.A8 X1.B8 X4.7

## Polygon pours and split planes (outlines as drawn)
GND on Top Layer "NONET_L-01_P-001" (solid, pour order 3): 44,-17.6 49.3,-17.6 49.3,-23 44,-23
GND on Top Layer "NONET_L-01_P-001" (solid, pour order 2): 24.6,-7.2 34.8,-7.2 34.8,-11.3 24.6,-11.3
GND_COVER on Top Layer "NONET_L-01_P-001" (solid, pour order 0): 0,35.5 60,35.5 60,3.5 0,3.5
GND on Bottom Layer "NONET_L-01_P-001" (solid, pour order 1): 60,-3.5 60,-35.5 0,-35.5 0,-3.5

## Keep-outs
Keep-Out Layer:
  rectangle: 0,-3.5 60,3.5

## Silkscreen, mask and mechanical layers (free items; w line width, h text height)
Top Overlay:
  text "M2x3.5 x 4pcs" at 0.776,-28.142 h0.5
Top Solder:
  drawing of 77 lines, arcs and shapes, not listed
  text "Act" at 11.2,31.2 h0.7
  text "P0" at 14.95,31.2 h0.7
  text "P1" at 18.5,31.2 h0.7
  text "PWR" at 38.1,31.2 h0.7
  text "IDL" at 41.7,31.2 h0.7
  text "MD" at 45.4,31.2 h0.7
  text "USB-C" at 27.7,30.95 h1
  text "ESP32 / RESET" at 48.667,30.25 h0.7
  text "SWD" at 2.2,26.95 h1
  text "GND" at 8.65,24 h0.7
  text "SWO" at 8.65,21.45 h0.7
  text "SWCLK" at 8.65,18.9 h0.7
  text "JTAG" at 24.55,17.45 h1 r90
  text "SWDIO" at 8.65,16.35 h0.7
  text "3.3V" at 8.65,13.8 h0.7
  text "ESP32-C5 Debug / BlackMagic Probe V1" at 56.75,10.15 h1 r90
  text "1" at 20.95,10 h0.7 r90
  text "2" at 16.25,9.7 h0.7 r90
  text "SERIAL" at 26.959,9.2 h1
  text "Tx" at 38.45,7.2 h0.7
  text "Rx" at 41.95,7.2 h0.7
  text "ESP32 / BOOT" at 48.667,6.25 h0.7
  text "3.3V" at 26.05,5.45 h0.7 r90
  text "Rx" at 28.633,5.45 h0.7 r90
  text "Tx" at 31.217,5.45 h0.7 r90
  text "GND" at 33.8,5.45 h0.7 r90
Board:
  lines w0.1: 0,13.037 cw(c0.25,13) 0.213,13.25 ; 0,13.047 0,7 ccw(c3.5,7) 3.5,3.5 cw(c3.5,0) 7,0 cw(c3.5,0) 3.5,-3.5 ccw(c3.5,-7) 0,-7 0,-32 ccw(c3.5,-32) 3.5,-35.5 56.5,-35.5 ccw(c56.5,-32) 60,-32 60,-28.5 57,-28.5 57,-10.5 60,-10.5 60,-7 ccw(c56.5,-7) 56.5,-3.5 cw(c56.5,0) 53,0 cw(c56.5,0) 56.5,3.5 ccw(c56.5,7) 60,7 60,10.5 ; 0.203,13.25 7,13.25 7,25.75 0.213,25.75 cw(c0.25,26) 0,25.963 0,32 cw(c3.5,32) 3.5,35.5 56.5,35.5 cw(c56.5,32) 60,32 60,28.5 ; 43.207,5.5 cw(c42.5,5.5) 43.207,5.5 ; 60.016,10.5 57.016,10.5 57.016,28.5 60.016,28.5 ; 12.707,33.5 ccw(c12,33.5) 12.707,33.5 ; 14.95,11 ccw(c15.2,11) 15.2,10.75 21.2,10.75 ccw(c21.2,11) 21.45,11 21.45,16.75 cw(c21.7,16.75) 21.7,17 22.2,17 ccw(c22.2,17.25) 22.45,17.25 22.45,21.75 ccw(c22.2,21.75) 22.2,22 21.7,22 cw(c21.7,22.25) 21.45,22.25 21.45,28 ccw(c21.2,28) 21.2,28.25 15.2,28.25 ccw(c15.2,28) 14.95,28 14.95,11 ; 16.207,33.5 ccw(c15.5,33.5) 16.207,33.5 ; 18.5,33 ccw(c19,33.5) 19.5,33 ccw(c19,33.5) 19.5,34 ccw(c19,33.5) 18.5,34 ccw(c19,33.5) 18.5,33 ; 39.707,5.5 ccw(c39,5.5) 39.707,5.5 ; 39.707,33.5 ccw(c39,33.5) 39.707,33.5 ; 43.207,33.5 ccw(c42.5,33.5) 43.207,33.5 ; 46.707,33.5 ccw(c46,33.5) 46.707,33.5
  lines w0.2: -8.468,-3.5 71.532,-3.5 ; -8.468,3.5 71.532,3.5
  text "V-CUT" at -18,2.539 h3
  text "V-CUT" at 72,2.539 h3
  text "V-CUT" at -18,-4.461 h3
  text "V-CUT" at 72,-4.461 h3